# Altium PCB plp-ctop_2a_assm.PcbDoc
Units mm, origin at the board's own origin, x right, y up, seen from the top; angles counter-clockwise.
Board outline 35.02 x 42 mm, 2 copper layers (Top Layer, Bottom Layer), stack 1.07 mm thick; 8 components, 9 nets, 39 pads, 0 vias.
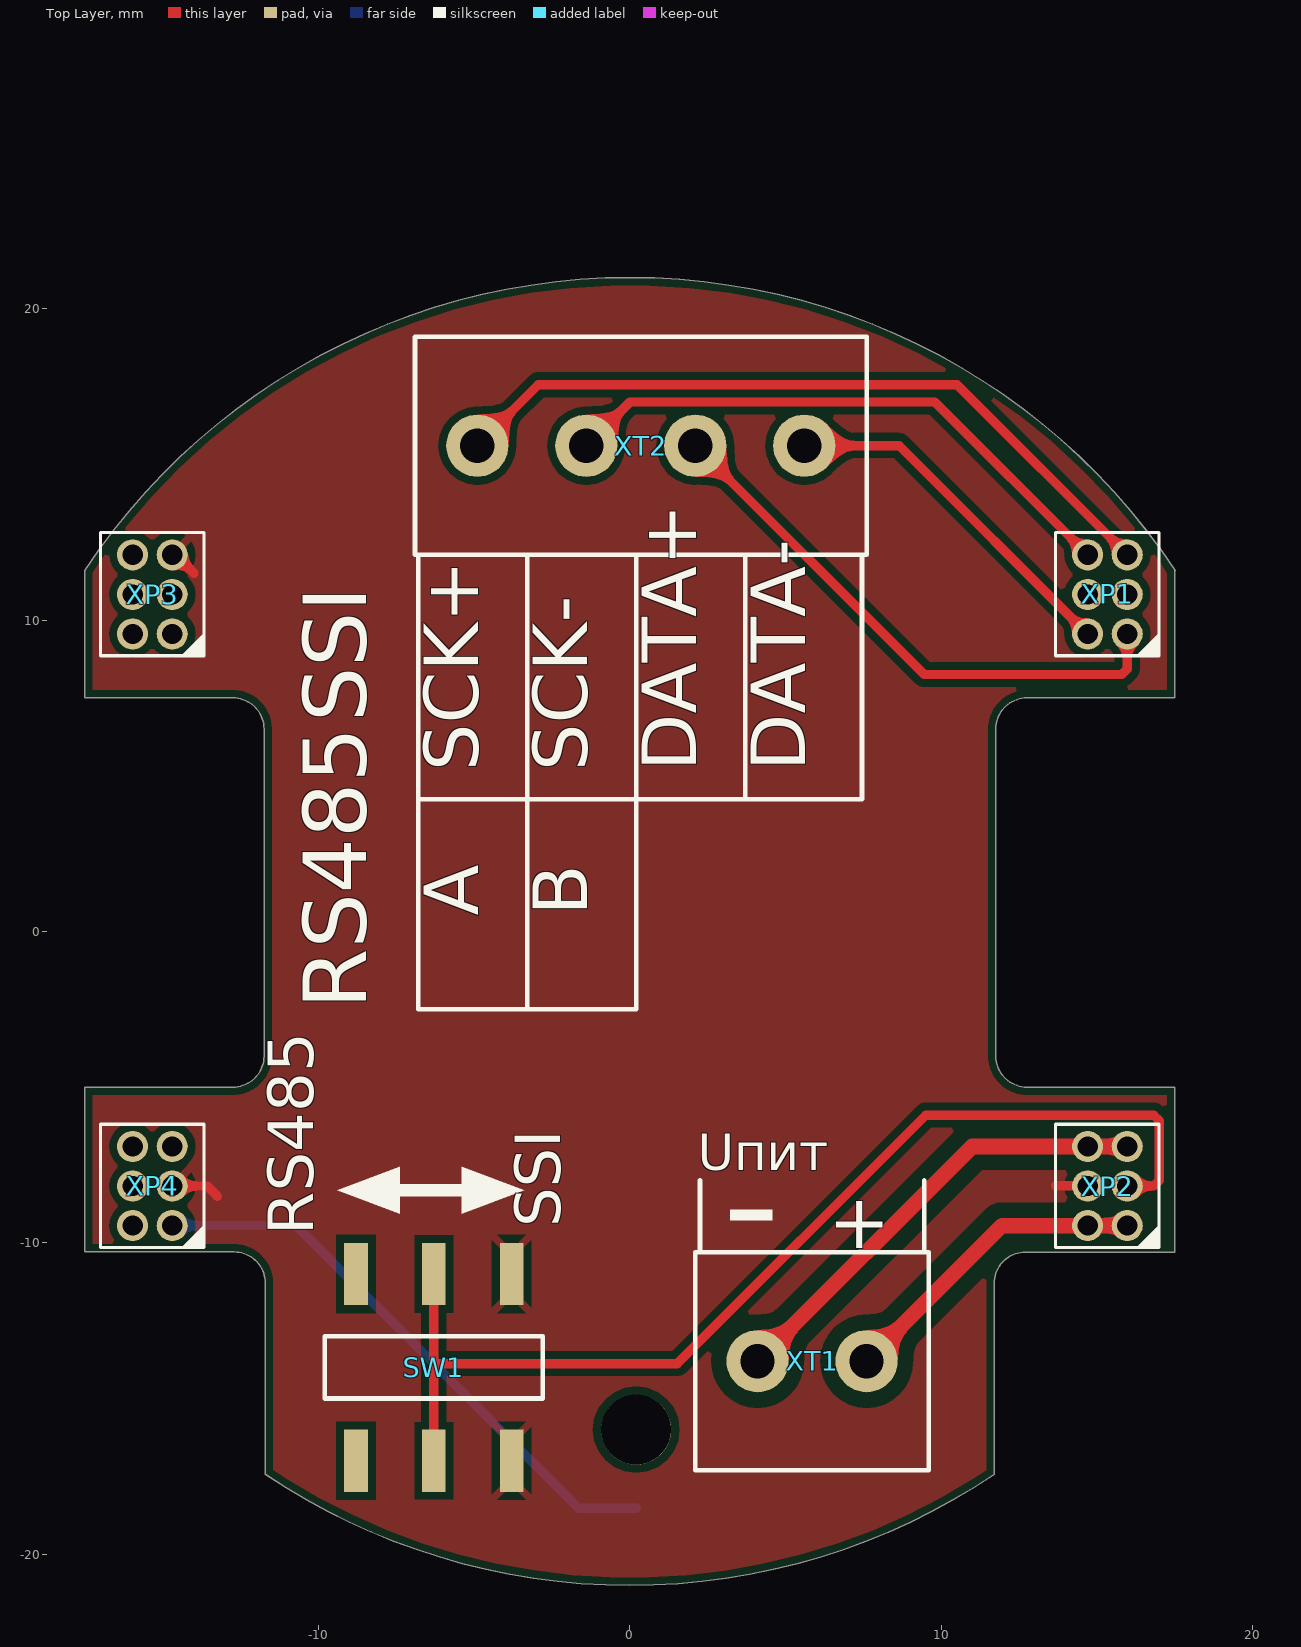
[diagram p0: Top Layer view]
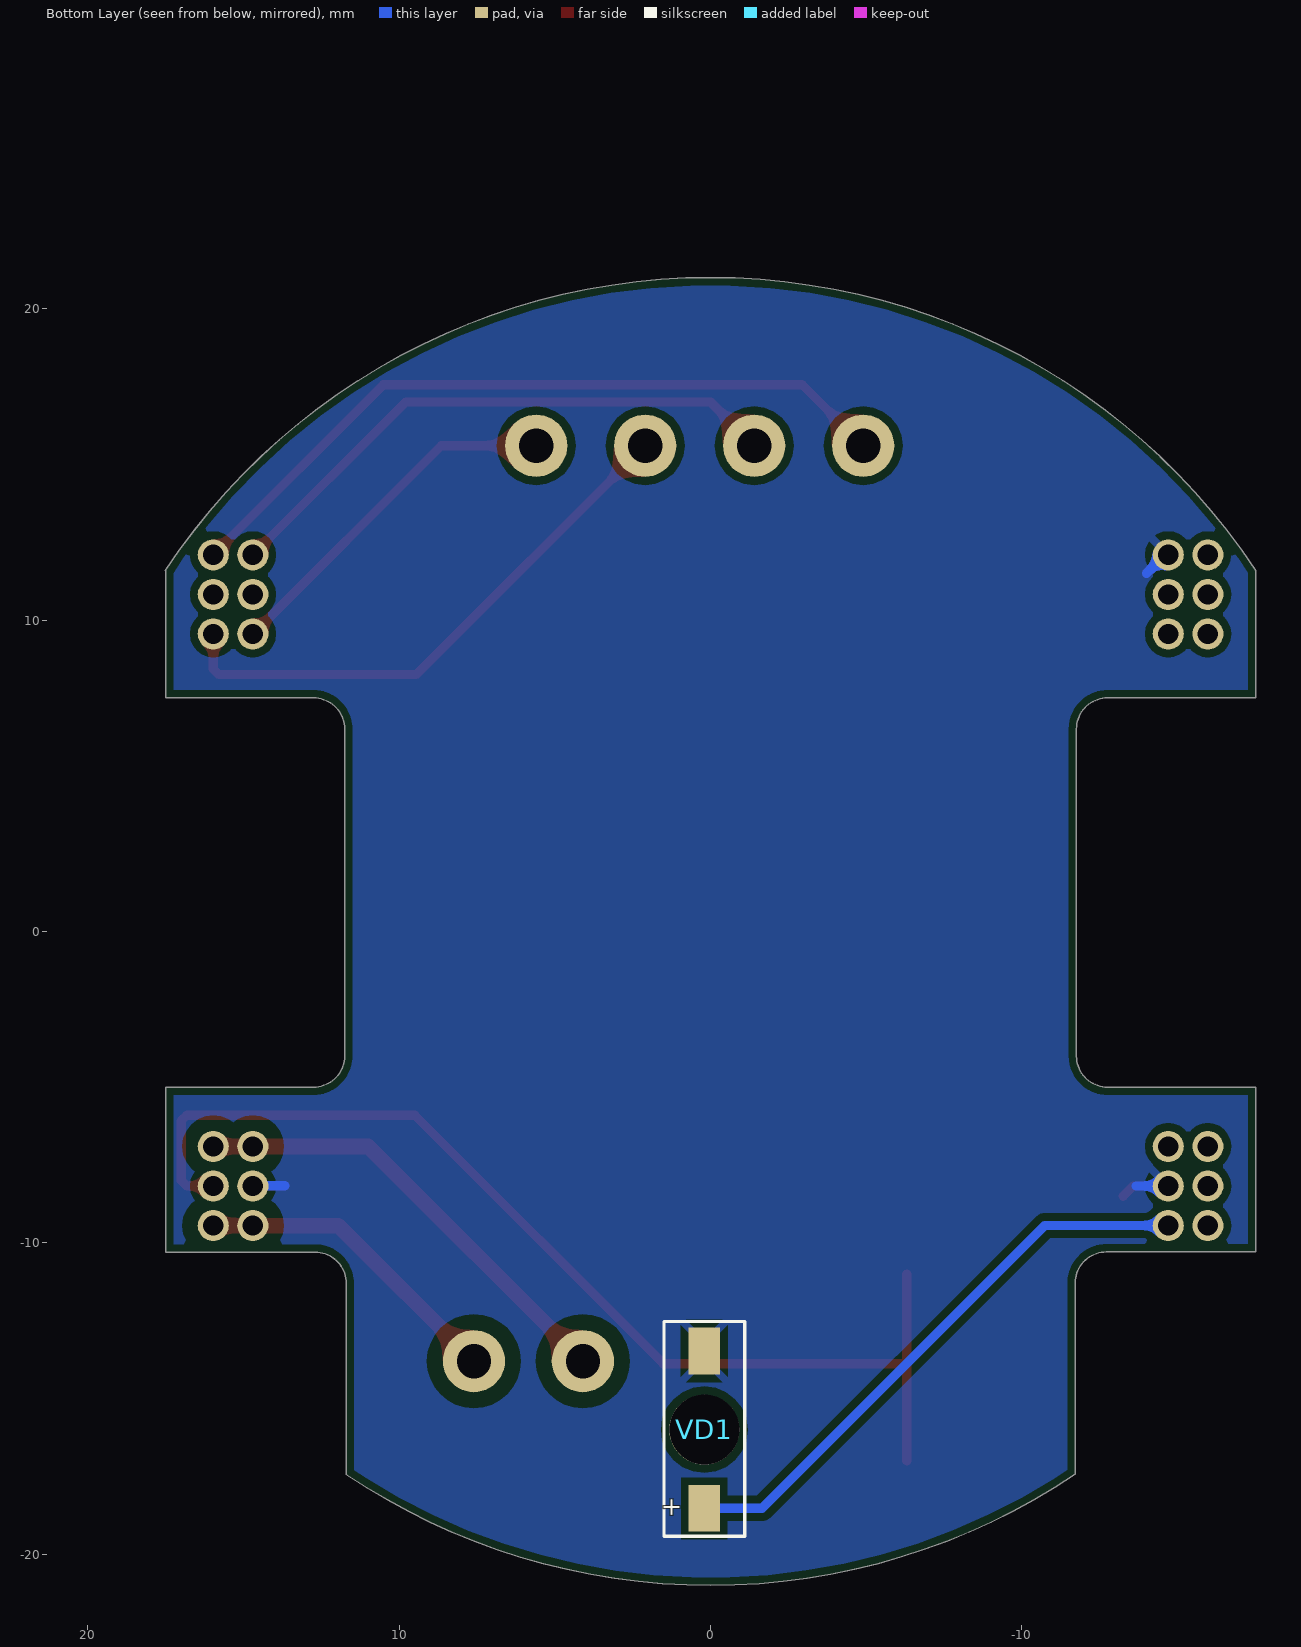
[diagram p1: Bottom Layer view, seen from below]

## Layer stack, top to bottom
Top Solder: solder mask 0.0102, Solder Resist, Dk 3.5
Top Layer: signal copper 0.035
Dielectric1: prepreg 1, FR-4, Dk 4.8
Bottom Layer: signal copper 0.035
Bottom Solder: solder mask 0.0102, Solder Resist, Dk 3.5

## Board outline
-17.511,-10.292 -17.511,-5 -12.75,-5 ccw(c-12.75,-4) -11.75,-4 -11.75,6.5 ccw(c-12.75,6.5) -12.75,7.5 -17.511,7.5 -17.511,11.591 cw(c0,0) 17.512,11.591 17.5,11.583 17.5,7.5 12.75,7.5 ccw(c12.75,6.5) 11.75,6.5 11.75,-4 ccw(c12.75,-4) 12.75,-5 17.5,-5 17.5,-10.3 12.7,-10.3 ccw(c12.7,-11.3) 11.7,-11.3 11.7,-17.439 cw(c0,0) -11.711,-17.431 -11.711,-11.292 ccw(c-12.711,-11.292) -12.711,-10.292

## Design rules (kind name [scope] priority, off if disabled: settings)
AcuteAngle [All] p1: minimum=4.40000000000000E+0001 checktracksonly=FALSE
BoardOutlineClearance [All] p1: gap=0.254 ignorepadtopadclearanceinfootprint=FALSE
Clearance Clearance_Bound [Not (OnBottomLayer Or OnTopLayer) vs IsBoardCutoutRegion Or IsBoardOutline] p1 off: gap=0.5 ignorepadtopadclearanceinfootprint=FALSE except(0: Arc-Hole Track-Hole SMDPad-Hole THPad-Hole Via-Hole Fill-Hole Poly-Hole Region-Hole Text-Hole)
Clearance Clearance_Poly [InNet('PE')] p2 off: gap=0.5 ignorepadtopadclearanceinfootprint=FALSE except(0: Arc-Hole Track-Hole SMDPad-Hole THPad-Hole Via-Hole Fill-Hole Poly-Hole Region-Hole Text-Hole)
Clearance Clearance_Poly_1 [InNet('-Uп') vs InNet('GND')] p3: gap=0.5 ignorepadtopadclearanceinfootprint=FALSE except(0.254: Arc-Hole Track-Hole SMDPad-Hole THPad-Hole Via-Hole Fill-Hole Poly-Hole Region-Hole Text-Hole)
Clearance Clearance_Poly_2 [InNet('+Uп') vs InNet('GND')] p4: gap=0.5 ignorepadtopadclearanceinfootprint=FALSE except(0.254: Arc-Hole Track-Hole SMDPad-Hole THPad-Hole Via-Hole Fill-Hole Poly-Hole Region-Hole Text-Hole)
Clearance Clearance_Poly_3 [InNet('OUT')] p5 off: gap=0.5 ignorepadtopadclearanceinfootprint=FALSE except(0: Arc-Hole Track-Hole SMDPad-Hole THPad-Hole Via-Hole Fill-Hole Poly-Hole Region-Hole Text-Hole)
Clearance Clearance_in [(OnLayer('MidLayer1') OR OnLayer('MidLayer2'))] p6 off: gap=0.2 ignorepadtopadclearanceinfootprint=FALSE except(0: Arc-Hole Track-Hole SMDPad-Hole THPad-Hole Via-Hole Fill-Hole Poly-Hole Region-Hole Text-Hole)
Clearance Clearance_out [(OnLayer('Bottom Layer') OR OnLayer('Top Layer'))] p7: gap=0.254 ignorepadtopadclearanceinfootprint=FALSE except(0: Arc-Hole Track-Hole SMDPad-Hole THPad-Hole Via-Hole Fill-Hole Poly-Hole Region-Hole Text-Hole)
HoleSize [All] p1: absolutevalues=TRUE maxlimit=2.54 minlimit=0.2 maxpercent=80.000 minpercent=20.000
MinimumAnnularRing [All] p1: minimumring=0.2
MinimumSolderMaskSliver [All] p1: minsoldermaskwidth=0
NetAntennae [All] p1: netantennaetolerance=5
PermittedLayers [All] p1: toplayerpermitted=TRUE bottomlayerpermitted=TRUE
PolygonConnect PolygonConnect_via [isvia] p1: connectstyle=Direct reliefconductorwidth=0.254 reliefentries=4 polygonreliefangle="90 Angle" airgapwidth=0.254
PolygonConnect [All] p2: thpad.connectstyle=Relief thpad.reliefconductorwidth=0.254 thpad.reliefentries=2 thpad.polygonreliefangle="45 Angle" thpad.airgapwidth=0.254 smdpad.connectstyle=Relief smdpad.reliefconductorwidth=0.254 smdpad.reliefentries=4 smdpad.polygonreliefangle="45 Angle" smdpad.airgapwidth=0.254 via.connectstyle=Relief via.reliefconductorwidth=0.254 via.reliefentries=2 via.polygonreliefangle="45 Angle" via.airgapwidth=0.254
RoutingVias [All] p1: holewidth=0.3 width=0.8 viastyle="Through Hole" minholewidth=0.2 minwidth=0.6 maxholewidth=0.4 maxwidth=1.27
SMDNeckDown [All] p1: percent=100.000
SMDToCorner [All] p1: distance=59055
SMDToPlane [All] p1: distance=0
ShortCircuit [All] p1: allowed=TRUE
SilkToSilkClearance [All] p1: silktosilkclearance=0.15
SilkToSolderMaskClearance SilkscreenOverComponentPads [IsPad] p1: minsilkscreentomaskgap=0.15 clearancetoexposedcopper=TRUE
SolderMaskExpansion [All] p1: expansion=0.1 istentingtop=FALSE
UnRoutedNet [All] p1: checkbadconnections=TRUE
ViasUnderSMD [All] p1: allowed=TRUE
Width [All] p1: maxlimit=3 minlimit=0.15 preferedwidth=0.25 minimp=50.000000 maximp=50.000000 favimp=50.000000
23 further rules are at their usual default settings.

## Components (designator, comment, footprint, x,y, rotation, side; value= is the part's Value field where it differs from the comment)
SW1 "JS202011SCQN" JS202011SCQN -8.8,-17 r0 top
VD1 "KM2520SURCK09" KM2520SURCK09 0.2,-18.525 r90 bottom
XP1 "2199R05-06G-301523" "CON: PLL-6(2x3R1.27female)" 17.012,8.8 r90 top locked
XP2 "2199R05-06G-301523" "CON: PLL-6(2x3R1.27female)" 17.012,-10.2 r90 top locked
XP3 "2199R05-06G-301523" "CON: PLL-6(2x3R1.27female)" -13.658,8.8 r90 top
XP4 "2199R05-06G-301523" "CON: PLL-6(2x3R1.27female)" -13.658,-10.2 r90 top
XT1 "MKDS 1/2 - 3,5" "MKDS 1/2 - 3,5" 7.6,-13.8 r180 top
XT2 "MKDS 1/4 - 3,5" "MKDS 1/4 - 3,5" -4.9,15.6 r0 top

## Footprints (in the part's own frame and the unit in brackets; to place one, negate y for a bottom-side part, rotate by r counter-clockwise, add the part's x,y. Pads: shape width x height; smd on the part's side, far side on the other; paste and mask are expansions set on the pad)
"CON: PLL-6(2x3R1.27female)" [mm]
  round 1 hole 0.65: 1(0.754,1.042) 2(0.754,2.312) 3(2.024,1.042) 4(2.024,2.312) 5(3.294,1.042) 6(3.294,2.312)
  silkscreen extent 0.05,0.02 4.01,3.34
JS202011SCQN [mm]
  rect 0.76x2 smd: 1(0,0) 2(2.5,0) 3(5,0) 4(5,6) 5(2.5,6) 6(0,6)
  silkscreen extent -1,2 6,4, body extent -1.98,-0.7 7.01,6.79, height 5.51
KM2520SURCK09 [mm] "SM LED Body 1.6x0.8mm; 2 Flat Leads"
  round 2.25 hole 2.25 unplated: 0(2.525,0)
  rect 1.5x1 smd: 1(0,0) 2(5.05,0)
  silkscreen extent -0.9,-1.3 6,1.3, body extent 1.1,-0.9 3.5,1, height 1.5
"MKDS 1/2 - 3,5" [mm]
  round 2 hole 1.1: 1(0,0) 2(3.5,0)
  silkscreen extent -2,-3.5 5.5,3.5, body extent -2,-3.5 5.5,3.8, height 8.5
"MKDS 1/4 - 3,5" [mm]
  round 2 hole 1.1: 1(0,0) 2(3.5,0) 3(7,0) 4(10.5,0)
  silkscreen extent -2,-3.5 12.5,3.5, body extent -2,-3.62 12.5,3.68, height 8.5

## Part data
SW1: "Переключатель", Manufacturer="C&K Component", ReplacementPart1Manufacturer=Китай, ReplacementPart1PartNumber=is-1390, ComponentLink1Description="Data Sheet", ComponentLink1URL=http://www.tycoelectronics.com/catalog/pn/en/1571983-4?RQPN=1571983-4, ComponentLink2Description="Replacement 1 DataSheet"
VD1: "LED"
XP1 XP2 XP3 XP4: library part 2199R05-06G-301523In, "Step 1.27"
XT2: ComponentLink1Description=Datasheet, ComponentLink1URL=https://www.phoenixcontact.com/online/portal/ru?uri=pxc-oc-itemdetail:pid=1751248&library=ruru&tab=1

## Nets (pads, with @x,y where several pads share a name; then routed paths per layer and width w, separated by ;. In a path a pad name is that pad's centre, name@x,y a point inside that pad or via, vN(x,y) a via of type N, cw(c..) or ccw(c..) an arc to the next point about the centre after c; other vN are vias at no path point)
+Uп: XP2.1 XP2.2 XT1.1 | length 10.2
  Top Layer w0.5: XT1.1 11.954,-9.446 XP2.2 XP2.1
-Uп: XP2.5 XP2.6 XT1.2 | length 14.7
  Top Layer w0.5: XT1.2 10.994,-6.906 XP2.6 XP2.5
A: XP1.1 XT2.3 | length 18.1
  Top Layer w0.3: XT2.3 9.45,8.25 15.794,8.25 15.97,8.426 XP1.1
B: XP1.2 XT2.4 | length 11.6
  Top Layer w0.3: XT2.4 8.645,15.6 14.691,9.554 XP1.2
GND: SW1.3 SW1.4 VD1.2 XP2.4 XP3.5 XP4.3 | length 6.6
  Top Layer w0.3: XP4.3 -13.574,-8.176 -13.25,-8.5 ; XP3.5 -14.594,12.094 -14,11.5 ; 13.669,-8.169 14.693,-8.169 XP2.4
  Bottom Layer w0.3: XP4.3 -13.675,-8.176 ; XP3.5 -14.594,12.094 -14,11.5 ; 13.669,-8.169 14.693,-8.169 XP2.4
GPIO0: SW1.2 SW1.5 XP2.3 | length 35.7
  Top Layer w0.3: SW1.2 -6.3,-13.879 ; SW1.5 -6.3,-13.879 ; XP2.3 16.824,-8.176 17,-8.001 17,-6.076 16.824,-5.9 9.5,-5.9 1.521,-13.879 -6.3,-13.879
LED: VD1.1 XP4.1 | length 18.7
  Bottom Layer w0.3: XP4.1 -10.732,-9.446 -1.654,-18.525 VD1.1
SCK_A: XP1.5 XT2.1 | length 23.9
  Top Layer w0.3: XT2.1 -2.942,17.558 10.505,17.558 XP1.5
SCK_B: XP1.6 XT2.2 | length 18.7
  Top Layer w0.3: XT2.2 0.004,17.004 9.789,17.004 XP1.6
pads on no net: SW1.1 SW1.6 VD1.0 XP1.3 XP1.4 XP3.1 XP3.2 XP3.3 XP3.4 XP3.6 XP4.2 XP4.4 XP4.5 XP4.6

## Polygon pours and split planes (outlines as drawn)
no net on Top Overlay "NONET_L02_P-001" (solid): -8.9,-8.065
GND on Top Layer "NONET_L02_P-001" (solid, pour order 0): -18,21 18,21 18,-21 -18,-21
GND on Bottom Layer "NONET_L02_P-001" (solid, pour order 1): -18,21 18,21 18,-21 -18,-21

## Other copper
Top Layer:
  region: 20.1,27.9
  region: 20.1,27.9
  region: 20.1,27.9
  region: 20.1,27.9
  region: 20.1,27.9
  region: 20.1,27.9
  region: 20.1,27.9
  region: 20.1,27.9
  region: 20.1,27.9
  region: 20.1,27.9
  region: 20.1,27.9
  region: 20.1,27.9
  region: 20.1,27.9

## Silkscreen, mask and mechanical layers (free items; w line width, h text height)
Top Overlay:
  region: -3.4,-8.315 -5.4,-9.065 -5.4,-7.565
  region: -9.4,-8.315 -7.4,-7.565 -7.4,-9.065
  region: 3.225,-8.931 3.225,-9.269 4.575,-9.269 4.575,-8.931
  lines w0.15: -6.8,4.25 7.45,4.25 7.45,12 ; -6.8,12 -6.8,-2.5 0.2,-2.5 0.2,12 ; -3.3,-2.5 -3.3,12 ; 2.25,-10.225 2.25,-8 ; 3.7,4.25 3.7,12 ; 9.45,-10.225 9.45,-8
  lines w0.4: -8.4,-8.315 -4.801,-8.315
  text "SSI" at -7.8,6.724 h3.5 r90
  text "SCK+" at -4.3,5.147 h3 r90
  text "SCK-" at -0.8,5.147 h3 r90
  text "DATA+" at 2.7,5.147 h3 r90
  text "DATA-" at 6.2,5.147 h3 r90
  text "A" at -4.3,0.5 h3 r90
  text "B" at -0.8,0.5 h3 r90
  text "RS485" at -7.8,-2.5 h3.5 r90
  text "Uпит" at 2.175,-8.051 h2
  text "SSI" at -1.75,-9.5 h2.5 r90
  text "RS485" at -9.694,-9.75 h2.5 r90
  text "+" at 6.375,-10.75 h3
Bottom Solder:
  circle w0: c0,0 r10
  region: -10,0 ccw(c0,0) 0,-10 ccw(c0,0) 10,0 ccw(c0,0) 0,10 ccw(c0,0)
  lines w0.25: 2,-18.75 3,-18.75 ; 2.51,-19.292 2.51,-18.292
Mechanical 1:
  lines w0.15: -17.001,-10.146 -17,-6.193 -13.675,-6.193 -13.675,-10.146 -17.001,-10.146 ; -17.001,8.854 -13.675,8.854 -13.675,12.807 -17,12.807 -17.001,8.854 ; -6.9,12.1 7.6,12.1 7.6,19.1 -6.9,19.1 -6.9,12.1 ; 2.1,-17.3 9.6,-17.3 9.6,-10.3 2.1,-10.3 2.1,-17.3 ; 13.668,-10.129 13.669,-6.175 16.994,-6.175 16.994,-10.129 13.668,-10.129 ; 13.676,8.853 13.676,12.807 17.001,12.807 17.001,8.853 13.676,8.853
  text "XT2" at -0.4,15.35 h0.5
  text "XP3" at -15.9,10.6 h0.5
  text "XP1" at 14.776,10.599 h0.5
  text "XP2" at 14.769,-8.383 h0.5
  text "XP4" at -15.9,-8.4 h0.5
  text "XT1" at 5.192,-14.05 h0.5
  text "SW1" at -7.058,-14.3 h0.5
Mechanical 2:
  lines w0.15: -0.5,-18.5 1,-18.5 ; 0.25,-19.25 0.25,-17.75 ; -17.001,-10.146 -13.675,-10.146 -13.675,-6.193 -17,-6.193 -17.001,-10.146 ; -17.001,8.854 -13.675,8.854 -13.675,12.807 -17,12.807 -17.001,8.854 ; -1.25,-19.5 1.5,-19.5 1.5,-12.5 -1.25,-12.5 -1.25,-19.5 ; 13.668,-10.129 16.994,-10.129 16.994,-6.175 13.669,-6.175 13.668,-10.129 ; 13.676,8.853 17.001,8.853 17.001,12.807 13.676,12.807 13.676,8.853
  text "XP3" at -14.6,10.6 h0.5
  text "XP1" at 15.9,10.6 h0.5
  text "XP4" at -14.6,-8.4 h0.5
  text "XP2" at 15.9,-8.4 h0.5
  text "VD1" at 1.5,-12 h2.5
Mechanical 3:
  circle w0.15: c0,0 r10
  circle w0.15: c-17,0 r2
  circle w0.15: c16.5,0 r2
  lines w0.1: -11.4,-17 -11.4,17 ; -10.4,-17 -10.4,17 ; 10.375,-17 10.375,17 ; 11.375,-17 11.375,17
Mechanical 4:
  lines w0.15: -12.761,-5 -17.511,-5 -17.511,-9.492 -17.511,-10.292 -12.711,-10.292 cw(c-12.711,-11.292) -11.711,-11.292 -11.711,-17.431 ccw(c0,0) 11.7,-17.439 11.7,-11.3 cw(c12.7,-11.3) 12.7,-10.3 17.5,-10.3 17.5,-9.5 17.5,-5 12.75,-5 cw(c12.75,-4) 11.75,-4 11.75,6.5 cw(c12.75,6.5) 12.75,7.5 17.5,7.5 17.5,11.583 ; -12.761,7.5 -17.511,7.5 -17.511,11.591 cw(c0,0) 17.512,11.591 ; -12.75,-5 ccw(c-12.75,-4) -11.75,-4 -11.75,6.5 ccw(c-12.75,6.5) -12.75,7.5

## Text inside footprints (layer, text, board x,y; h text height)
VD1: Bottom Overlay "+" at 0.8,-18.825 h1 r270